# Altium PCB УШЯИ.467444.130.PcbDoc (part 2 of 4)
Units mm, origin at the board's own origin, x right, y up, seen from the top; angles counter-clockwise.
Board outline 280 x 190 mm, 6 copper layers (Top, GND, INT1, INT2, POWER, Bottom), stack 1.422 mm thick; 223 components, 176 nets, 1081 pads, 326 vias.
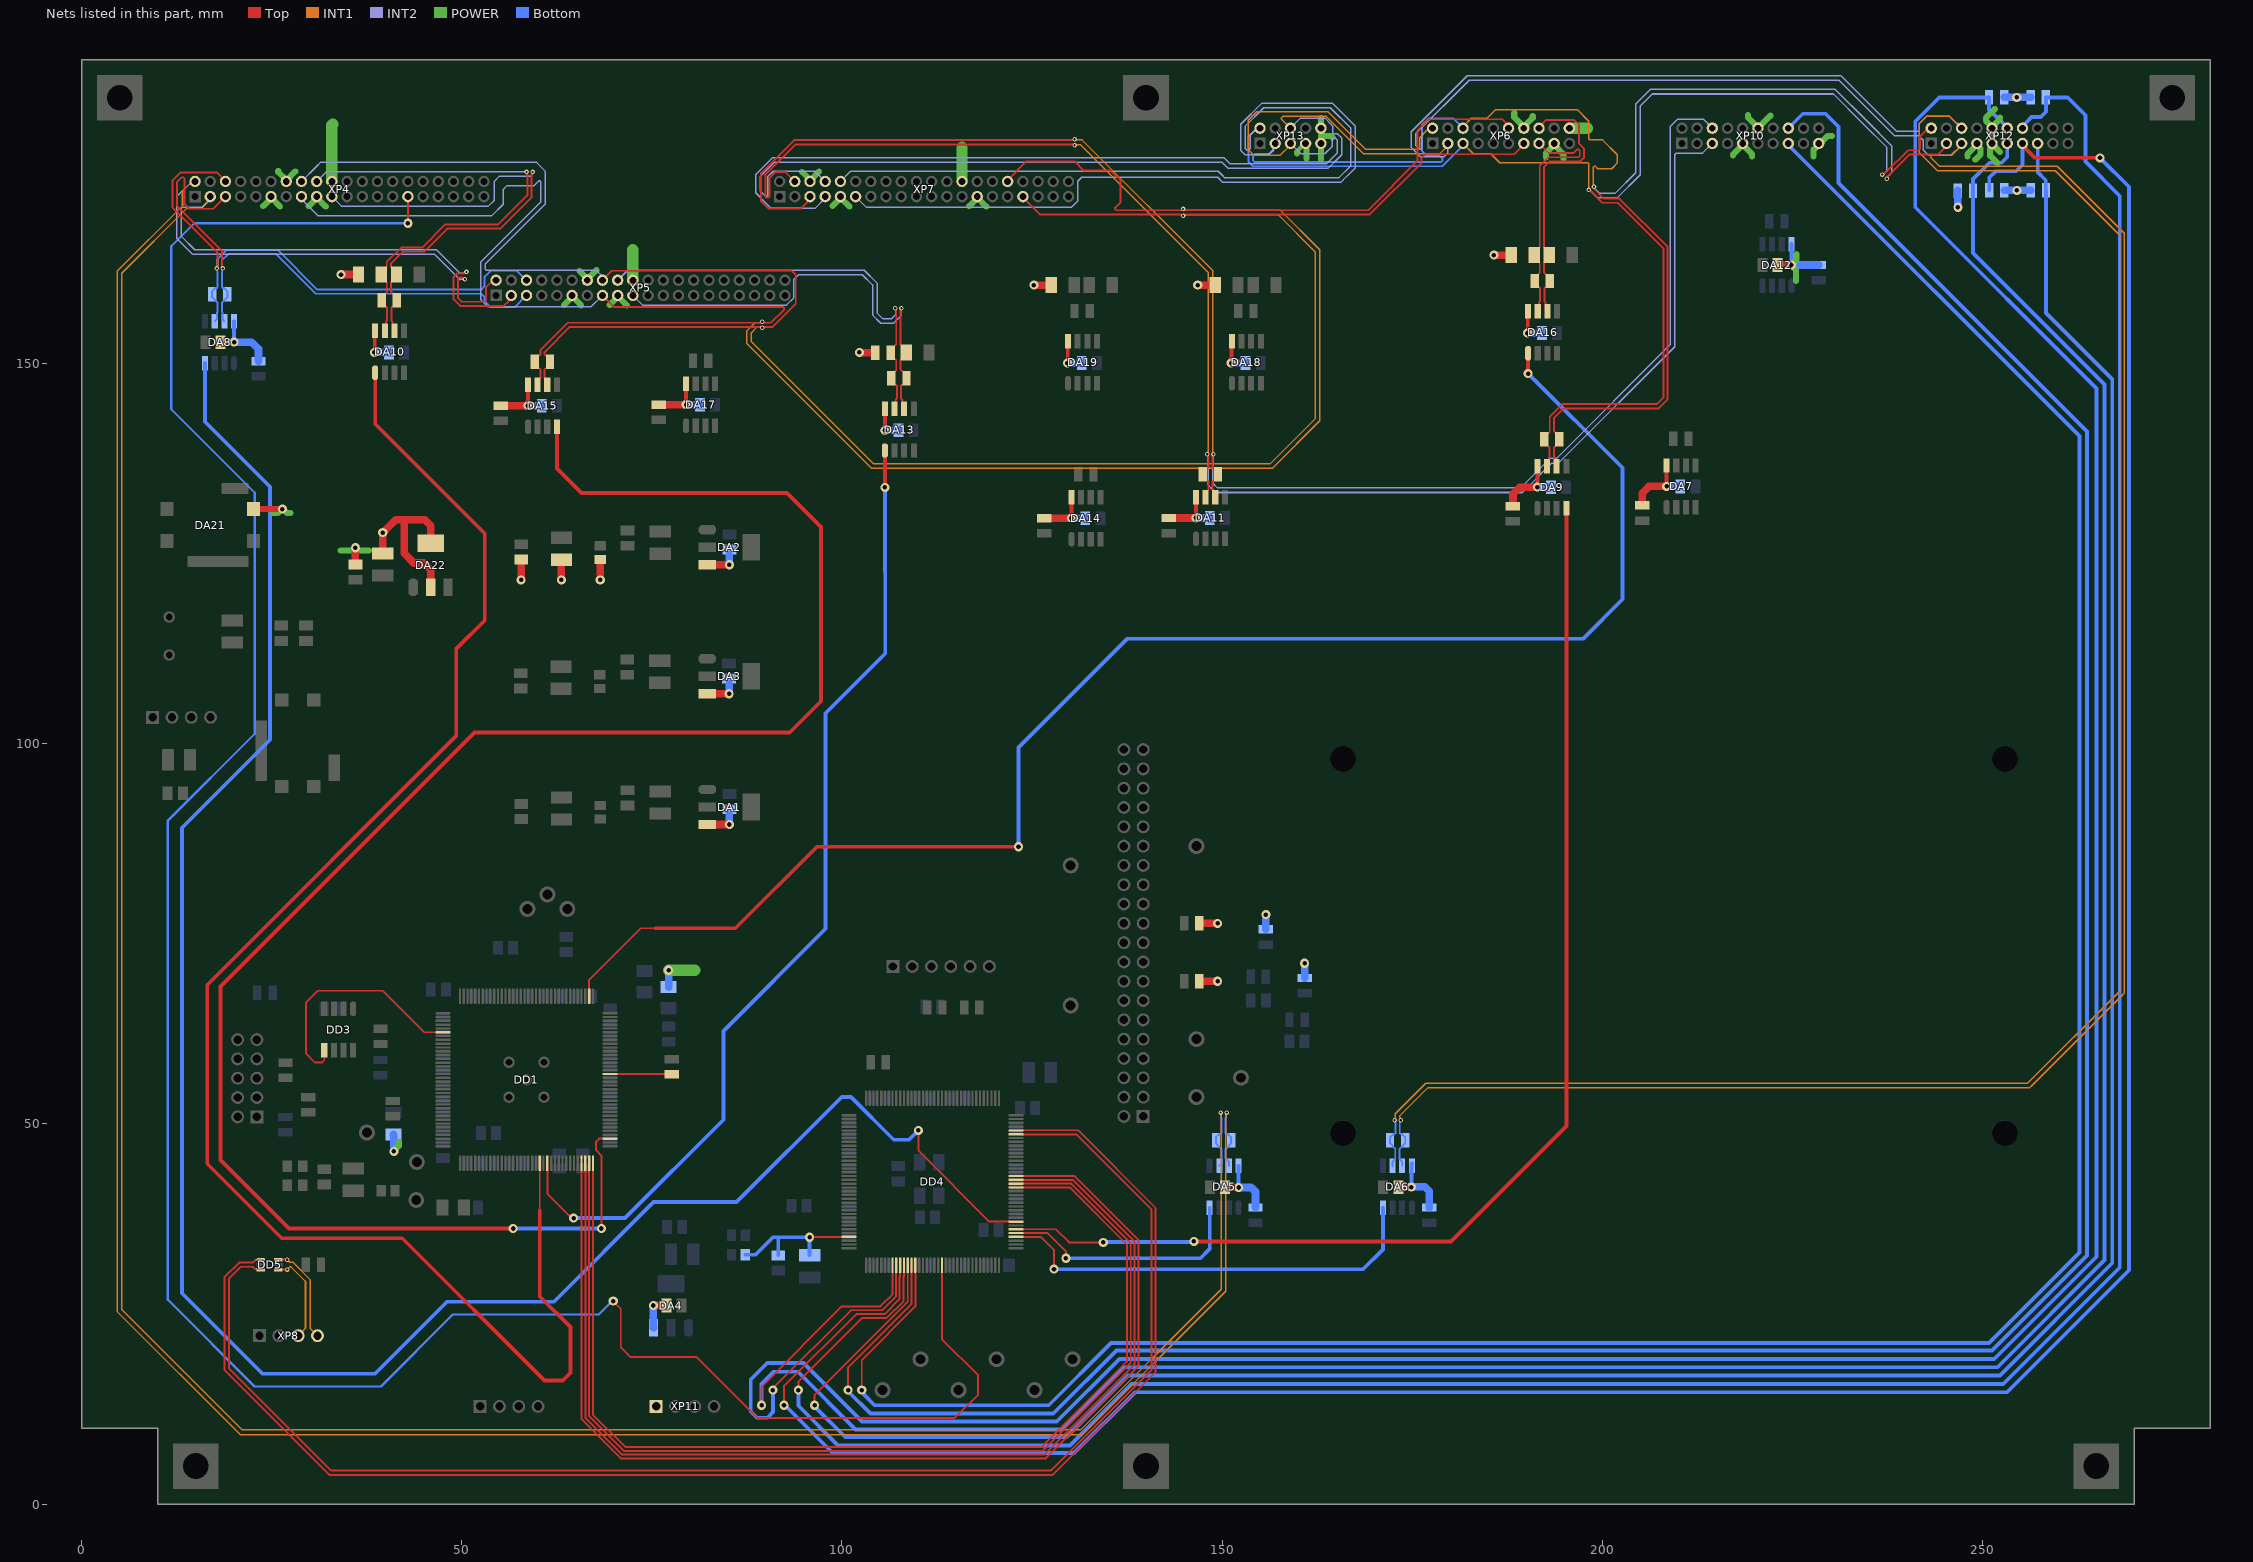
[diagram p6: the nets of this part, all layers, seen from the top]

## Part data
A1: library part Other_15, "8GB Rockchip RK3588, HDMI 2.1, Gigabit LAN port, USB2.0/3.0, microSD card slot, USB Type-C", Manufacturer="Orange Pi", Component Name="Одноплатный компьютер Orange Pi 5 Plus 8GB", Device="Orange Pi 5 Plus", Height=29mm, ID=Other_15, Other information="Идет с покупным устройством: твердотельный накопитель Kingspec SSD NE-128 2280", Weight, kg=0,107, Крепёж="Стойка УШЯИ.753124.023-01 (4шт.), винт В2.М3-6gx8.36.016 ГОСТ 17473-80 (4шт.), гайка М3-7Н.04.016 ГОСТ 5927-70 (4шт.), шайба 3.65Г.016 ГОСТ 6402-70 (8шт.),  шайба 3.04.013 ГОСТ 11371-78 (8шт.)"
C1 C27 C29 C31 C32 C33 C34 C35 C36 C37 C38 C39 C41 C42 C43 C44 C45 C46 C47 C48 C49 C50 C51 C52 C53 C54 C55 C56 C57 C58 C63 C65 C68 C69 C70 C71 C72 C73 C74 C75 C76 C77 C78 C79 C80 C81 C82 C84 C87 C90 C91 C92 C95: library part Cap_60, "Неполярный конденсатор", Case / Package="0805 [2012 Metric]", Manufacturer=Murata, Tolerance=±10%, Voltage=50V, Capacitance="0,1 µF", Component Name="Конденсатор GRM21BR71H104KA01L", Datasheet=https://www.murata.com/en-eu/products/productdetail?partno=GRM21BR71H104KA01%23, Height=1.4mm, ID=Cap_60, Weight, kg=0,000006
  C27 C29: ClassName=Class_VCINT
  C39: ClassName=Class_VCCIO
  C69: ClassName=DA8
  C70: ClassName=DA9
  C71: ClassName=DA7
  C72: ClassName=DA10
  C73: ClassName=DA11
  C74: ClassName=DA12
  C75: ClassName=DA13
  C76: ClassName=DA14
  C77: ClassName=DA15
  C78: ClassName=DA16
  C79: ClassName=DA17
  C80: ClassName=DA18
  C81: ClassName=DA19
C2 C11 C26 C28 C30 C59: library part Cap_14, "Полярный конденсатор", Case / Package="1210 [3528-21 Metric]", Manufacturer="KYOCERA AVX", Tolerance=±10%, Voltage="20V / 10V", Capacitance="4,7 µF", Component Name="Конденсатор TAJB475K020", Datasheet=https://datasheets.kyocera-avx.com/TAJ.pdf, Height=2mm, ID=Cap_14, Weight, kg=0,000016
  C11: ClassName=Class_+2.5V
  C26: ClassName=Class_VCCIO
  C28 C30: ClassName=Class_VCINT
C3 C6 C7 C8 C9 C10 C12 C14 C15 C17 C18 C19 C20 C21 C22 C23 C24 C25 C94: library part Cap_97, "Неполярный конденсатор", Case / Package="0805 [2012 Metric]", Manufacturer=Murata, Tolerance=±10%, Voltage=25V, Capacitance="0,1 µF", Catalogue="CHIPDIP 9000121574", Component Name="Конденсатор GRM21BR71E104KA01L", Datasheet=https://static.chipdip.ru/lib/250/DOC000250694.pdf, Height=1.4mm, ID=Cap_97, Weight, kg=0,000006
  C3 C10 C15: ClassName=Class_+2.5V
  C12: ClassName=Class_VCINT
  C14 C25: ClassName=Class_VCCIO
C4 C5: library part Cap_96, "Неполярный конденсатор", Case / Package="0805 [2012 Metric]", Manufacturer=Murata, Tolerance=±10%, Voltage=16V, Capacitance="1 µF", Catalogue="CHIPDIP 8046406206", Component Name="Конденсатор GRM21BR71H105KA01L", Datasheet=https://static.chipdip.ru/lib/223/DOC011223313.pdf, Height=1.4mm, ID=Cap_96, Weight, kg=0,000006
C16 C40 C62 C64 C88 C89 C93: library part Cap_56, "Полярный конденсатор", Case / Package="1210 [3528-21 Metric]", Manufacturer="KYOCERA AVX", Tolerance=±20%, Voltage="20V / 10V", Capacitance="10 µF", Component Name="Конденсатор TAJB106M020", Datasheet=https://datasheets.kyocera-avx.com/TAJ.pdf, Height=2mm, ID=Cap_56, Weight, kg=0,000016
  C16: ClassName=Class_+2.5V
  C40: ClassName=Class_VCCIO
C60 C61: library part Cap_69, "Неполярный конденсатор", Case / Package="0805 [2012 Metric]", Manufacturer=Murata, Tolerance=±5%, Voltage=50V, Capacitance="20 pF", Component Name="Конденсатор GRM2165C1H200J", Datasheet=chrome-extension://efaidnbmnnnibpcajpcglclefindmkaj/https://static.chipdip.ru/lib/235/DOC000235066.pdf, Height=1.4mm, ID=Cap_69, Weight, kg=0,000006
C66 C67: library part Cap_16, "Полярный конденсатор", Case / Package="1206 [3216-18 Metric]", Manufacturer=AVX, Tolerance=±20%, Voltage="16V / 10V", Capacitance="2,2 µF", Component Name="Конденсатор TAJA225M016", Datasheet=https://datasheets.kyocera-avx.com/TAJ.pdf, Height=1.7mm, ID=Cap_16, Weight, kg=0,000016
C86: library part Cap_70, "Полярный конденсатор", Manufacturer=Hitano, Tolerance="± 20%", Voltage=16V, Capacitance="1000 µF", Component Name="Конденсатор EXR102M16B", Datasheet=chrome-extension://efaidnbmnnnibpcajpcglclefindmkaj/https://static.chipdip.ru/lib/934/DOC044934708.pdf, Height=21mm, ID=Cap_70, Weight, kg=0,003
DA1 DA4 DA22: library part IC_1, "IC, Fixed LDO Voltage Regulator, 5.3V to 10V, 1.15V Dropout, 3.3Vout, 1Aout", Case / Package=SOT-223, Manufacturer=STMicroelectronics, Catalogue="DIGI-KEY 497-1228-2-ND", Component Name="Микросхема LD1117AS33TR", Datasheet=https://www.st.com/content/ccc/resource/technical/document/datasheet/a5/c3/3f/c9/2b/15/40/49/CD00002116.pdf/files/CD00002116.pdf/jcr:content/translations/en.CD00002116.pdf, Device=LD1117AS33TR, Height=1.9mm, ID=IC_1, Weight, kg=0,0045
  DA1: ClassName=Class_VCCIO
DA2: library part IC_8, "IC, Linear Voltage Regulator, 1 Output, 1V Dropout, 2.5Vout, 1Aout", Case / Package=SOT-223, Manufacturer=STMicroelectronics, Catalogue="DIGI-KEY 497-1227-1-ND", ClassName=Class_+2.5V, Component Name="Микросхема LD1117AS25TR", Datasheet=https://www.st.com/content/ccc/resource/technical/document/datasheet/a5/c3/3f/c9/2b/15/40/49/CD00002116.pdf/files/CD00002116.pdf/jcr:content/translations/en.CD00002116.pdf, Device=LD1117AS25TR, Height=1.9mm, ID=IC_8, Weight, kg=0,0045
DA3: library part IC_9, "IC, Fixed LDO Voltage Regulator, 1 Output, 1V Dropout, 1.2Vout, 1Aout", Case / Package=SOT-223, Manufacturer=STMicroelectronics, Catalogue="DIGI-KEY 497-6445-1-ND", ClassName=Class_VCINT, Component Name="Микросхема LD1117AS12TR", Datasheet=https://www.st.com/content/ccc/resource/technical/document/datasheet/a5/c3/3f/c9/2b/15/40/49/CD00002116.pdf/files/CD00002116.pdf/jcr:content/translations/en.CD00002116.pdf, Device=LD1117AS12TR, Height=1.9mm, ID=IC_9, Weight, kg=0,0045
DA5 DA6 DA7 DA8 DA9 DA11 DA12 DA14 DA17: library part IC_11, "IC, Transceiver, RS422/RS485, 1 Driver, 1 Receiver, 4.75 V to 5.25 V, -40°C to 125°C", Case / Package=SOIC-8, Manufacturer="Analog Devices", Component Name="Микросхема ADM483AR", Datasheet=https://www.analog.com/media/en/technical-documentation/data-sheets/ADM383.pdf, Device=ADM483AR, Height=1.75mm, ID=IC_11, Weight, kg=0,0002
  DA7: ClassName=DA7
  DA8: ClassName=DA8
  DA9: ClassName=DA9
  DA11: ClassName=DA11
  DA12: ClassName=DA12
  DA14: ClassName=DA14
  DA17: ClassName=DA17
DA10 DA13 DA15 DA16 DA18 DA19: library part IC_57, "IC, RS422 / RS485 Transceiver IC, 1 Driver, 1 Receiver, 3 V to 3.6 V, -40°C to 125°C, SOIC-8", Case / Package=SOIC-8, Manufacturer="Texas Instruments", Catalogue="ChipDip 8002953832", Component Name="Микросхема SN65HVD75D", Datasheet=https://static.chipdip.ru/lib/276/DOC012276983.pdf, Device=SN65HVD75D, Height=1.75mm, ID=IC_57, Weight, kg=0,002
  DA10: ClassName=DA10
  DA13: ClassName=DA13
  DA15: ClassName=DA15
  DA16: ClassName=DA16
  DA18: ClassName=DA18
  DA19: ClassName=DA19
DA20 DA21: library part Filt_2, "16В, 35дБ", Current=20А, Manufacturer="Murata Electronics", Component Name="Фильтр BNX028-01", Datasheet=https://static.chipdip.ru/lib/614/DOC034614186.pdf, Device=BNX028-01, Height=3.7mm, ID=Filt_2, Weight, kg=0,001
DD1: library part IC_13, "IC, Cyclone III, Field Programmable Gate Array (FPGA), 	1.15V to 1.25V, 315 MHz, 94 I/O", Case / Package="144-EQFP (20x20)", Manufacturer=Intel, Catalogue="DIGI-KEY EP3C5E144I7-ND", Component Name="Микросхема EP3C5E144I7", Datasheet=https://www.intel.com/content/dam/support/us/en/programmable/support-resources/bulk-container/pdfs/literature/hb/cfg/cyc-c51014.pdf, Device=EP3C5E144I7, Height=1.6mm, ID=IC_13, Weight, kg=0,012
DD2: library part Other_16, "Crystals, Oscillators, 20 MHz", Manufacturer="Jauch Quartz GmbH", Component Name="Кварцевый генератор O 20,0-JO32-B-3.3-1-T1-LF", Datasheet=https://static.chipdip.ru/lib/464/DOC049464856.pdf, Device="O 20,0-JO32-B-3.3-1-T1-LF", Height=1.15mm, ID=Other_16, Weight, kg=0,001
DD3: library part IC_12, "IC, FPGA Configuration Memory, Flash, 4 Mbit, 40 MHz, JTAG, Serial", Case / Package=SOIC-8, Manufacturer=Intel, Catalogue="FARNELL 1662262", Component Name="Микросхема EPCS4SI8N", Datasheet=https://www.intel.com/content/dam/support/us/en/programmable/support-resources/bulk-container/pdfs/literature/hb/cfg/cyc-c51014.pdf, Device=EPCS4SI8N, Height=1.75mm, ID=IC_12, Weight, kg=0,0002
DD4: library part IC_15, "IC, ARM Cortex-M4, 168 MHz, 1 MB ROM, 192 kB RAM, -40°C to 85°C", Case / Package="144-QFP (20x20)", Manufacturer=STMicroelectronics, Component Name="Микросхема STM32F407ZGTx", Datasheet=https://www.st.com/resource/en/datasheet/dm00037051.pdf, Device=STM32F429VIT6STM32F407ZGTx, Height=1.6mm, ID=IC_15, Weight, kg=0,0011
DD5: library part IC_5, "EMI Filter, 2-Channel, USB Upstream Terminator, ESD Protection", Case / Package=SOT-323-6, Manufacturer=STMicroelectronics, Catalogue="FARNELL 2341662", Component Name="Микросхема USBUF01W6", Datasheet=https://www.farnell.com/datasheets/1964274.pdf, Device=USBUF01W6, Height=1.1mm, ID=IC_5, Weight, kg=0,000006
L1 L3 L4 L5: library part Ind_4, Manufacturer=Murata, Resistance="0.1 ohm", Tolerance=±20%, Component Name="Дроссель LQH31CNR22M03", Datasheet=https://www.murata.com/products/productdetail?partno=LQH31CNR22M03%23, Height=2mm, ID=Ind_4, Inductance="0,22 μH", Isat=850mA, Weight, kg=0,00003
L2 L6 L7 L8 L9 L10: library part Ind_5, Case / Package="0805 [2012 Metric]", Manufacturer=Vishay, Resistance="300 mOhm", Tolerance=±25%, Catalogue="DIGI-KEY 541-2297-1-ND", Component Name="Фильтр ферритовый ILBB0805ER601V", Datasheet=https://www.vishay.com/docs/34025/ilbb0805.pdf, Height=1.1mm, ID=Ind_5, Isat=200mA, Weight, kg=0,00006
  L2: ClassName=Class_VCCIO
  L6: ClassName=Class_+2.5V
  L7: ClassName=Class_VCINT
R2: library part Res_12, Case / Package="0805 [2012 Metric]", Tolerance=±5%, Component Name="Резистор 0805-51 Ом ±5%", Height=0.7mm, ID=Res_12, Resistance=51R, Weight, kg=0,000006
R3 R5 R7: library part Res_11, Case / Package="0805 [2012 Metric]", Tolerance=±5%, Component Name="Резистор 0805-1 кОм ±5%", Height=0.7mm, ID=Res_11, Resistance=1k, Weight, kg=0,000006
R4 R6 R8 R9 R10 R11 R12 R13 R14 R15 R17 R19 R20 R21 R28 R29 R35 R36 R42: library part Res_5, Case / Package="0805 [2012 Metric]", Tolerance=±5%, Component Name="Резистор 0805-10 кОм ±5%", Height=0.7mm, ID=Res_5, Resistance=10k, Weight, kg=0,000006
  R19: ClassName=DA7
  R20: ClassName=DA8
  R21: ClassName=DA9
  R28: ClassName=DA11
  R29: ClassName=DA12
  R35: ClassName=DA14
  R36: ClassName=DA15
  R42: ClassName=DA17
R16 R18 R22 R23 R24 R26 R30 R31 R32 R33 R38 R39 R40 R44 R45 R47: library part Res_10, Case / Package="0805 [2012 Metric]", Tolerance=±5%, Component Name="Резистор 0805-100 Ом ±5%", Height=0.7mm, ID=Res_10, Resistance=100R, Weight, kg=0,000006
  R22: ClassName=DA8
  R23: ClassName=DA9
  R24: ClassName=DA7
  R26: ClassName=DA10
  R30 R31: ClassName=DA13
  R32: ClassName=DA11
  R33: ClassName=DA12
  R38: ClassName=DA16
  R39: ClassName=DA14
  R40: ClassName=DA15
  R44: ClassName=DA18
  R45: ClassName=DA17
  R47: ClassName=DA19
R25 R27 R34 R37 R41 R43 R46 R48 R49: library part Res_50, Case / Package="1206 [3216 Metric]", Tolerance=±5%, Component Name="Резистор 1206-1 кОм ±5%", Height=0.7mm, ID=Res_50, Resistance=1k, Weight, kg=0,0000162
  R25 R27: ClassName=DA10
  R34: ClassName=DA13
  R37 R41: ClassName=DA16
  R43 R48: ClassName=DA18
  R46 R49: ClassName=DA19
R50: library part Res_89, Case / Package="0805 [2012 Metric]", Tolerance=±5%, Component Name="Резистор 0805-30 Ом ±5%", Height=0.7mm, ID=Res_89, Resistance=30R, Weight, kg=0,000006
R51 R52 R53 R54 R55 R56 R57 R58 R59 R60 R61: library part Res_57, Case / Package="0805 [2012 Metric]", Tolerance=±1%, Component Name="Резистор 0805-10 кОм ±1%", Height=0.7mm, ID=Res_57, Resistance=10k, Weight, kg=0,000006
TP1 TP2 TP3 TP4 TP5 TP6 TP7 TP8 TP9 TP10 TP11 TP12 TP13 TP14 TP15 TP16 TP17 TP18: library part Pad_13, Component Name=TP_DSP_1.3, ID=Pad_13
XP1: library part Conn_7, "Male, 10 pins, 2 rows, Vertical", Manufacturer="Connfly electronic", Component Name="Вилка PLD-10", Datasheet=https://static.chipdip.ru/lib/977/DOC005977245.pdf, Device=PLD-10, Height=10.8mm, ID=Conn_7, Weight, kg=0,00052, Крепёж="Не нужно"
XP2: library part Conn_2, "Male, 6 pin, 1 row, Vertical, Board-to-Board, 2.54 mm", Manufacturer="TE Connectivity", Catalogue="TE Internal 280372-2", Component Name="Вилка AMPMODU II 280372-2", Datasheet=https://www.te.com/usa-en/product-280372-2.datasheet.pdf, Device="AMPMODU II 280372-2", Height=12.8mm, ID=Conn_2, Weight, kg=0,0013, Крепёж="Не нужно"
XP3: library part Conn_30, "Male, 40 pins, 2 rows, Vertical, DS1013-40S, 2.54 mm", Manufacturer="Connfly electronic", Catalogue="ChipDip 57941", Component Name="Вилка BH-40", Datasheet=https://static.chipdip.ru/lib/525/DOC059525716.pdf, Device=BH-40, Height=9.1mm, ID=Conn_30, Weight, kg=0,0045, Крепёж="Не нужно"
XP4 XP5 XP7: library part Conn_29, "Male, 40 pins, 2 rows, Vertical, DS1014-40, 2 mm", Manufacturer="Connfly electronic", Catalogue="ChipDip 9000019617", Component Name="Вилка BH2-40", Datasheet=https://static.chipdip.ru/lib/525/DOC059525726.pdf, Device=BH2-40, Height=5.8mm, ID=Conn_29, Weight, kg=0,0014, Крепёж="Не нужно"
XP6 XP10 XP12: library part Conn_31, "Male, 20 pins, 2 rows, Right Angle, DS1014-20RF1B-B, 2 mm", Manufacturer="Connfly electronic", Catalogue="ChipDip 8027300167", Component Name="Вилка BH2-20R", Datasheet=https://static.chipdip.ru/lib/525/DOC059525726.pdf, Device=BH2-20R, Height=5.6mm, ID=Conn_31, Weight, kg=0,0016, Крепёж="Не нужно"
XP8 XP9 XP11 XP14: library part Conn_3, "Male, 4 pin, 1 row, Vertical, Board-to-Board, 2.54 mm", Manufacturer="TE Connectivity", Catalogue="TE Internal 280371-2", Component Name="Вилка AMPMODU II 280371-2", Datasheet=https://www.te.com/usa-en/product-280371-2.datasheet.pdf, Device="AMPMODU II 280371-2", Height=12.8mm, ID=Conn_3, Weight, kg=0,001, Крепёж="Не нужно"
XP13: library part Conn_32, "Male, 10 pins, 2 rows, Vertical, DS1014-10RF1B-B, 2 mm", Manufacturer="Connfly electronic", Catalogue="ChipDip 8144058573", Component Name="Вилка BH2-10R", Datasheet=https://static.chipdip.ru/lib/525/DOC059525726.pdf, Device=BH2-10R, Height=5.6mm, ID=Conn_32, Weight, kg=0,00071, Крепёж="Не нужно"
ZQ1: library part Rez_1, Frequency=25MHz, Manufacturer="Jauch Quartz GmbH", Component Name="Резонатор Q 25.0JXS63-12-30/30-FU", Datasheet=https://www.jauch.com/downloadfile/57fdedace792c_938dbcb9dba48037cc0e/jxs63-200613.pdf, Device="Q 25.0JXS63-12-30/30-FU", Height=1mm, ID=Rez_1, Weight, kg=0,001

## Free pads (board coordinates)
  rect 6x6 hole 3.4: 0(5,185) 0(15,5) 0(140,5) 0(140,185) 0(265,5) 0(275,185)

## Via types
v1: diameter 1.2, hole 0.6, Top to Bottom, tented both sides, 284 vias
v2: diameter 0.6, hole 0.3, Top to Bottom, tented both sides, 42 vias

## Nets (pads, with @x,y where several pads share a name; then routed paths per layer and width w, separated by ;. In a path a pad name is that pad's centre, name@x,y a point inside that pad or via, vN(x,y) a via of type N, cw(c..) or ccw(c..) an arc to the next point about the centre after c; other vN are vias at no path point)
3/50V: DD4.57 XP4.29 | length 329.6
  Top w0.25: v1@69.925,26.65 70.907,25.668 70.907,20.618 72.175,19.35 80.85,19.35 88.875,11.325 114.825,11.325 117.9,14.4 117.9,16.975 113.162,21.713 DD4.57@113.162,31.412
  Top w0.3: v1(42.9,168.5) XP4.29@42.9,172
  Bottom w0.3: v1(42.9,168.5) 14.789,168.5 11.775,165.486 11.775,144.025 22.75,133.05 22.75,101.35 11.325,89.925 11.325,26.875 22.725,15.475 39.35,15.475 48.8,24.925 68,24.925 69.775,26.7 v1(69.914,26.7) ; XP4.29@42.9,171.675 XP4.29@42.9,172
20+E: DD4.48 R61.2 XP12.15 | length 356.8
  Top w0.25: v1@96.4,12.85 96.4,14.364 108.662,26.626 DD4.48@108.662,31.412
  Bottom w0.5: v1@96.4,12.85 100.425,8.825 129.553,8.825 137.628,16.9 252.328,16.9 267.1,31.672 267.1,148 258.4,156.7 R61.2@258.4,172.825 ; XP12.15@257.3,179 257.3,175.225 258.375,174.15 R61.2@258.375,172.825
  other v1: 96.4,13
20-E: DD4.47 R60.2 XP12.14 | length 377.5
  Top w0.25: v1@94.275,14.85 94.275,16.075 102.7,24.5 105.9,24.5 108.112,26.712 108.112,29.912 108.162,29.962 DD4.47@108.162,31.412
  Bottom w0.5: v1@94.275,14.85 94.275,12.925 99.5,7.7 129.984,7.7 138.084,15.8 252.784,15.8 268.1,31.116 268.1,172.1 263.6,176.6 263.6,182.7 261.25,185.05 R60.2@258.375,185.05 ; XP12.14@255.3,181 255.3,181.271 255.723,181.694 255.723,181.698 256.5,182.475 257.7,182.475 258.4,183.175 R60.2@258.4,185.025
  other v1: 94.275,15
50E+: DD4.50 XP10.15 | length 350.6
  Top w0.25: v1(102.6,15) 102.6,18.95 109.662,26.012 DD4.50@109.662,31.412
  Bottom w0.5: v1(102.6,15) 102.6,14.811 102.905,14.506 102.905,14.395 104.3,13 127.2,13 135.4,21.2 250.9,21.2 262.8,33.1 262.8,140.5 224.5,178.8 XP10.15@224.5,179
50E-: DD4.49 XP10.16 | length 363
  Top w0.25: v1(100.813,15) 100.813,18.001 109.162,26.351 DD4.49@109.162,31.412
  Bottom w0.5: v1(100.813,15) 100.813,14.837 103.75,11.9 127.8,11.9 136.1,20.2 251.314,20.2 263.8,32.686 263.8,141.1 231.1,173.8 231.1,181.2 229.4,182.9 226.4,182.9 XP10.16@224.5,181
200+E: DD4.46 R59.2 XP12.13 | length 385.2
  Top w0.25: v1@92.375,12.85 92.375,15.475 101.9,25 105.6,25 107.587,26.987 107.587,29.887 107.662,29.962 DD4.46@107.662,31.412
  Top w0.5: XP12.13@255.3,179 255.3,178.729 256.929,177.1 v1(265.5,177.1)
  Bottom w0.5: v1(92.375,13) 92.5,13 98.8,6.7 130.54,6.7 138.54,14.7 253.24,14.7 269.3,30.76 269.3,173.3 v1(265.5,177.1) ; R59.2@250.925,172.825 250.925,174.5 251.75,175.325 254.425,175.325 255.3,176.2 XP12.13@255.3,179
200-E: DD4.45 R58.2 XP12.12 | length 401.5
  Top w0.25: v1(90.925,15) 90.925,15.225 101.2,25.5 105.3,25.5 107.137,27.337 107.137,30.414 107.137,31.387 DD4.45@107.162,31.412
  Bottom w0.5: v1@90.925,14.85 90.925,12.103 90.186,11.364 88.814,11.364 88,12.178 88,16.4 90.175,18.575 94.925,18.575 102.65,10.85 128.25,10.85 136.5,19.1 251.6,19.1 265.039,32.539 265.039,146.761 241.2,170.6 241.2,181.9 244.35,185.05 R58.2@250.9,185.05 250.9,183.475 253.3,181.075 XP12.12@253.3,181
3000VE: DD4.44 R57.2 XP12.11 | length 378.2
  Top w0.25: v1@89.425,12.85 89.425,15.425 100,26 105.05,26 106.662,27.612 DD4.44@106.662,31.412
  Bottom w0.5: v1@89.425,12.85 89.425,15.825 91,17.4 94.2,17.4 101.775,9.825 128.781,9.825 136.956,18 252,18 266.1,32.1 266.1,147.3 248.8,164.6 248.8,174.3 250.95,176.45 252.55,176.45 253.3,177.2 XP12.11@253.3,179
  other v1: 89.425,13
+2.5V: C15.2 C16.+ L1.1 L3.1 L6.2 | length 17.4
  Top w1: v1(57.8,121.575) C15.2@57.8,124.275 ; v1(63.1,121.575) C16.+@63.1,124.225 ; v1(68.2,121.575) L6.2@68.2,124.275
  POWER w0.8: v1(41.05,46.405) 41.05,46.46 41.72,47.129 41.72,47.605
  POWER w1.5: v1(77.2,70.225) 80.625,70.225
  Bottom w1: L1.1@41,48.625 41.025,48.6 41.025,46.43 v1(41.05,46.405) ; L3.1@77.2,68.025 v1(77.2,70.225)
+3.3VB: C72.2 C75.2 C77.2 C78.2 C80.2 C81.2 C92.2 C93.+ DA10.8 DA13.8 DA15.8 DA16.8 DA18.8 DA19.8 DA22.2 DA22.4 R30.1 R36.1 R37.1 R43.1 R51.1 R52.1 R55.1 R56.1 R57.1 R58.1 R59.1 R60.1 R61.1 XP4.20 XP5.20 XP6.20 XP7.26 XP10.19 XP12.7 XP13.7 | length 116.9
  Top w0.5: v1(38.5,151.5) 38.547,151.547 38.547,154.302 DA10.8@38.595,154.35 ; v1(58.695,144.5) DA15.8@58.695,147.25 ; v1(105.645,141.247) DA13.8@105.645,144.097 ; v1(129.65,150.1) 129.697,150.147 129.697,152.902 DA19.8@129.745,152.95 ; v1(151.2,150.1) 151.247,150.147 151.247,152.902 DA18.8@151.295,152.95 ; v1(190.175,154.05) 190.223,154.097 190.223,156.853 DA16.8@190.27,156.9
  Top w1: C92.2@36,123.6 v1(36,125.8) ; C93.+@39.6,125.05 v1(39.6,127.8) ; v1@39.638,127.838 41.3,129.5 42.4,129.5 ; DA22.2@45.8,120.7 DA22.2@45.9,120.6 ; DA22.2@45.9,121.3 45.9,122.9 45,123.8 43.7,123.8 42.4,125.1 42.4,129.5 ; DA22.4@45.9,126.4 45.9,128.7 45.1,129.5 42.4,129.5 ; R36.1@55.1,144.5 v1(58.695,144.5) ; v1(102.3,151.497) 102.326,151.471 104.374,151.471 R30.1@104.4,151.445 ; v1(146.8,160.35) R43.1@149.1,160.35 ; R55.1@147.025,68.776 v1(149.425,68.776) ; R56.1@147.027,76.398 149.423,76.398 v1(149.425,76.4) ; v1(185.775,164.3) R37.1@188.075,164.3
  POWER w0.6: 159.849,177.849 159.849,177.935 160.914,179 XP13.7@161,179 161,178.512 XP13.7@161.175,178.337
  POWER w0.8: 34.05,125.425 34.075,125.45 35.575,125.45 35.925,125.8 v1(36,125.8) 36.108,125.8 36.483,125.425 37.8,125.425 ; 159.849,177.671 159.849,177.849 ; 161.1,177.05 XP13.7@161.1,178.262 ; 227.819,177.283 227.819,178.181 228.5,178.862 XP10.19@228.5,179 228.689,179 229.639,179.95 230.25,179.95 ; 248.049,177.283 248.049,177.559 XP12.7@249.3,178.811 ; 249.088,176.865 249.787,177.564 249.787,178.324 XP12.7@249.3,178.811 ; XP12.7@249.3,179 XP12.7@249.3,178.811
  POWER w1: XP6.20@195.7,181 XP6.20@195.7,181.051
  POWER w1.5: XP4.20@32.9,174 32.9,181.4 33,181.5 ; XP5.20@72.5,161 72.5,165 ; XP7.26@115.8,174 115.8,178.516 ; XP6.20@195.7,181 198.08,181
  Bottom w1: v1(38.5,151.5) C72.2@40.4,151.5 ; v1(58.695,144.5) C77.2@60.505,144.5 ; v1@105.55,141.247 v1(105.645,141.247) C75.2@107.45,141.247 ; v1(129.65,150.1) C81.2@131.55,150.1 ; v1(151.2,150.1) C80.2@153.1,150.1 ; R52.1@155.775,75.6 v1(155.775,77.55) ; R51.1@160.875,69.2 v1(160.875,71.15) ; v1(190.175,154.05) C78.2@192.075,154.05 ; v1(246.8,170.6) R57.1@246.8,172.8 ; R58.1@252.9,185.05 v1(254.55,185.05) R60.1@256.375,185.05 ; R59.1@252.925,172.825 v1(254.575,172.825) R61.1@256.4,172.825
+5V: C3.2 C12.2 C14.2 C58.1 C65.2 C68.2 C69.2 C70.2 C71.2 C73.2 C74.2 C76.2 C79.2 DA1.3 DA2.3 DA3.3 DA4.3 DA5.8 DA6.8 DA7.8 DA8.8 DA9.8 DA11.8 DA12.8 DA14.8 DA17.8 DA21.2 R15.1 R17.1 R19.1 R20.1 R21.1 R25.1 R28.1 R29.1 R35.1 R42.1 R46.1 XP4.11 XP4.14 XP4.17 XP5.11 XP5.14 XP5.17 XP6.14 XP6.17 XP7.6 XP7.9 XP7.27 XP10.9 XP10.12 XP11.1 XP12.9 XP12.10 XP13.9 XP13.10 | length 179
  Top w0.5: v1(79.495,144.634) DA17.8@79.495,147.384 ; v1(130.195,129.7) DA14.8@130.195,132.45 ; v1(146.57,129.725) DA11.8@146.57,132.475 ; v1(191.489,133.775) DA9.8@191.489,136.525 ; v1(208.489,133.875) DA7.8@208.489,136.625
  Top w0.8: DA21.2@22.603,130.9 v1(26.4,130.9) ; C65.2@150.4,41.7 C65.2@150.425,41.675 ; v1@152.16,41.675 v1(152.185,41.65)
  Top w1: C69.2@18.25,152.85 v1(20.036,152.85) ; v1(34.1,161.75) R25.1@36.4,161.75 ; v1(75.2,26.125) C58.1@76.9,26.125 C58.1@76.925,26.125 ; R42.1@75.9,144.634 v1(79.495,144.634) ; DA3.3@82.25,106.6 v1(85.15,106.6) ; DA1.3@82.3,89.4 v1(85.2,89.4) ; DA2.3@82.3,123.575 v1(85.2,123.575) ; v1(125.25,160.35) R46.1@127.55,160.35 ; R35.1@126.6,129.7 v1(130.195,129.7) ; R28.1@142.975,129.725 v1(146.57,129.725) ; C65.2@150.425,41.675 v1@152.16,41.675 ; C68.2@173.2,42.1 173.2,41.85 173.35,41.7 v1(174.9,41.7) ; R21.1@188.275,131.275 188.275,132.875 189.175,133.775 v1(191.489,133.775) ; R19.1@205.275,131.375 205.275,132.975 206.175,133.875 v1(208.489,133.875) ; C74.2@223.095,163 v1(224.905,163)
  POWER w0.8: 23.85,170.761 XP4.11@24.9,171.811 ; XP4.11@24.9,171.885 26.1,170.685 ; 25.19,130.375 25.767,130.375 26.292,130.9 v1(26.4,130.9) 26.508,130.9 27.033,130.375 27.484,130.375 ; 25.85,175.362 25.85,175.239 26.9,174.189 XP4.14@26.9,174.115 ; XP4.14@26.9,174 XP4.14@26.9,174.115 ; 28.1,175.315 XP4.14@26.9,174.115 ; 29.85,170.761 XP4.17@30.9,171.811 ; XP4.17@30.9,171.885 32.1,170.685 ; 63.45,157.761 XP5.11@64.5,158.811 ; XP5.11@64.5,158.885 65.7,157.685 ; 65.45,162.239 XP5.14@66.5,161.189 ; XP5.14@66.5,161.115 67.7,162.315 ; 69.45,157.761 XP5.17@70.5,158.811 ; XP5.17@70.5,158.885 71.7,157.685 ; 94.75,175.239 XP7.6@95.8,174.189 ; XP7.6@95.8,174.115 97,175.315 ; 98.75,170.761 XP7.9@99.8,171.811 ; XP7.9@99.8,171.885 101,170.685 ; 116.75,170.761 XP7.27@117.8,171.811 ; XP7.27@117.8,171.885 119,170.685 ; 163,176.879 XP13.9@163,179 163,180 ; 163,182.362 XP13.10@163,181 ; XP13.10@163.189,181 XP13.10@163,181 ; 164.5,179.811 164.311,180 163,180 ; 188.449,183.024 188.449,182.441 XP6.14@189.7,181.189 ; XP6.14@189.7,181 XP6.14@189.7,181.189 ; 190.875,182.586 190.875,182.364 XP6.14@189.7,181.189 ; 192.596,177.163 192.596,177.707 XP6.17@193.7,178.811 ; XP6.17@193.7,179 XP6.17@193.7,178.811 ; 194.909,176.929 194.909,177.602 XP6.17@193.7,178.811 ; 217.249,177.383 217.249,177.559 XP10.9@218.5,178.811 ; XP10.9@218.5,179 XP10.9@218.5,178.811 ; 219.181,182.746 219.181,182.439 220.5,181.119 XP10.12@220.5,181 222.137,182.637 222.167,182.637 ; 219.735,177.283 219.735,177.576 XP10.9@218.5,178.811 ; v1@224.905,162.946 224.905,162.937 225.51,162.331 225.51,160.904 ; v1@224.905,163.054 225.6,163.749 225.6,164.474 ; XP12.9@251.3,178.907 252.332,177.875 ; 251.652,183.5 250.5,182.348 250.5,181.989 XP12.10@251.3,181.189 ; 251.981,176.435 251.05,177.366 251.05,178.255 251.166,178.371 251.166,178.866 XP12.9@251.3,179 XP12.10@251.3,181 XP12.10@251.3,181.189 ; 252.366,182.387 252.366,182.255 XP12.10@251.3,181.189 ; 163,180 XP13.10@163,181
  POWER w1: v1@224.905,162.946 v1(224.905,163) v1@224.905,163.054
  Bottom w0.5: v1(20.036,152.85) DA8.8@20.036,155.6 ; v1(152.185,41.65) DA5.8@152.185,44.492 ; v1@174.975,41.775 174.937,41.812 174.937,44.755 DA6.8@174.975,44.792 ; v1(224.905,163) DA12.8@224.905,165.75
  Bottom w1: v1(20.036,152.85) 22.35,152.85 23.25,151.95 R20.1@23.25,150.35 ; v1(75.2,26.125) 75.203,26.122 75.203,23.203 DA4.3@75.206,23.2 ; v1(79.495,144.634) C79.2@81.305,144.634 ; v1(85.15,106.6) 85.15,107.9 ; v1(85.2,89.4) 85.2,90.7 ; v1(85.2,123.575) 85.2,124.875 ; v1(130.195,129.7) C76.2@132.005,129.7 ; v1(146.57,129.725) C73.2@148.38,129.725 ; v1(152.185,41.65) 153.819,41.65 154.405,41.064 R15.1@154.405,39.017 ; v1@174.975,41.775 v1(174.9,41.7) 174.954,41.7 175.007,41.753 176.689,41.753 177.275,41.167 R17.1@177.275,39.017 ; v1(191.489,133.775) C70.2@193.275,133.775 ; v1(208.489,133.875) C71.2@210.275,133.875 ; v1(224.905,163) R29.1@228.5,163
A0_RG: DD1.71 DD4.90 | length 145.3
  Top w0.25: DD1.71@66.75,44.837 66.75,41.579 66.75,11.571 71.321,7 126.429,7 138,18.571 138,34.332 130.182,42.15 DD4.90@122.9,42.15
A1_RG: DD1.70 DD4.91 | length 147.9
  Top w0.25: 66.25,41.549 DD1.70@66.25,44.837 ; 66.25,41.654 66.25,11.364 71.114,6.5 126.636,6.5 138.5,18.364 138.5,34.539 130.389,42.65 DD4.91@122.9,42.65
A2_RG: DD1.72 DD4.89 | length 142.9
  Top w0.25: 67.25,41.6 DD1.72@67.25,44.837 ; 67.25,41.64 67.25,11.778 71.528,7.5 126.222,7.5 137.5,18.778 137.5,34.125 129.975,41.65 DD4.89@122.9,41.65
ASDO: DD1.6 DD3.5 | length 31.6
  Top w0.25: DD3.5@31.895,59.375 31.895,58.42 31.56,58.085 30.68,58.085 29.5,59.265 29.5,66.003 31.022,67.525 39.6,67.525 45.05,62.075 DD1.6@47.512,62.075
AVCST: C63.2 C64.+ DD4.33 L9.2 | length 19.4
  Top w0.25: v1(95.75,35.1) 95.8,35.15 DD4.33@100.924,35.15
  Bottom w0.5: L9.2@87.275,32.8 88.625,32.8 90.925,35.1 91.575,35.1 ; C63.2@91.625,32.725 91.625,35.05 91.575,35.1 ; C64.+@95.75,32.725 v1(95.75,35.1) 91.575,35.1
CLK1_DAC: DA8.4 DD4.80 | length 269.2
  Top w0.25: v1(110.05,49.15) 110.075,49.125 110.075,46.475 119.4,37.15 DD4.80@122.9,37.15
  Bottom w0.5: DA8.4@16.226,150.1 16.226,142.374 24.775,133.825 24.775,100.55 13.2,88.975 13.2,27.725 23.775,17.15 38.575,17.15 48.05,26.625 62.1,26.625 75.225,39.75 86.15,39.75 99.968,53.568 101.182,53.568 106.825,47.925 108.825,47.925 v1(110.05,49.15)
CLK1_DAC_n: DA8.7 R22.1 XP4.5 XP5.5 | length 78
  Top w0.25: v2(18.55,162.55) 18.483,162.617 18.483,162.813 18.425,162.871 18.425,164.853 12.5,170.778 12.5,173.897 13.146,174.544 13.354,174.544 13.5,174.397 13.5,171.049 14.15,170.399 17.299,170.399 XP4.5@18.9,172
  Bottom w0.25: DA8.7@18.766,155.6 18.531,155.836 18.531,156.744 18.425,156.85 18.425,158.025 19.15,158.75 R22.1@19.15,159.15 19.15,159.55 18.725,159.975 18.571,159.975 18.425,160.121 18.425,162.05 18.483,162.108 18.483,162.483 v2(18.55,162.55) 18.483,162.617 18.483,162.813 18.425,162.871 18.425,163.604 19.271,164.45 25.55,164.45 30.778,159.222 52.528,159.222 53,158.75 53,158.25 53.75,157.5 57,157.5 XP5.5@58.5,159
CLK1_DAC_p: DA8.6 R22.2 XP4.6 XP5.6 | length 76.7
  Top w0.25: v2(17.75,162.55) 17.817,162.617 17.817,162.813 17.875,162.871 17.875,164.625 11.95,170.55 11.95,174.125 13,175.175 17.725,175.175 XP4.6@18.9,174
  Bottom w0.25: DA8.6@17.496,155.6 17.763,155.867 17.763,156.713 17.875,156.825 17.875,158.025 17.15,158.75 R22.2@17.15,159.15 17.15,159.55 17.575,159.975 17.729,159.975 17.875,160.121 17.875,162.05 17.817,162.108 17.817,162.483 v2(17.75,162.55) 17.817,162.617 17.817,162.813 17.875,162.871 17.875,163.831 19.044,165 25.778,165 31.006,159.772 52.522,159.772 53,160.25 53,161.471 53.779,162.25 57.25,162.25 XP5.6@58.5,161
CLK2_DAC: DA9.4 DD4.78 | length 160.8
  Top w0.25: DD4.78@122.9,36.15 128.15,36.15 129.875,34.425 v1(134.375,34.425)
  Top w0.5: v1(146.3,34.55) 180.125,34.55 195.299,49.724 DA9.4@195.299,131.025
  Bottom w0.25: v1(134.375,34.425) v1@134.437,34.488 ; v1@146.238,34.488 v1(146.3,34.55)
  Bottom w0.5: v1@134.437,34.488 v1@146.238,34.488
CLK2_DAC_n: DA9.7 R23.1 XP6.5 XP7.10 XP12.2 XP13.2 | length 276.4
  Top w0.25: DA9.7@192.759,136.525 192.994,136.761 192.994,137.669 193.1,137.775 193.1,138.95 192.375,139.675 R23.1@192.375,140.075 192.375,140.475 192.8,140.9 192.954,140.9 193.108,141.055 193.108,143.056 194.752,144.7 207.2,144.7 208.069,145.569 208.069,165.178 202.048,171.199 200.02,171.199 198.52,172.7 198.345,172.875 v2(198.25,172.875) ; v2(236.874,174.901) 236.969,174.901 237.389,175.321 237.471,175.321 240.25,178.1 241.654,178.1 241.8,178.246 241.8,179.875 242.567,180.642 242.604,180.642 242.962,181 XP12.2@243.3,181
  INT1 w0.2: XP6.5@181.7,179 183.05,177.65 185.353,177.65 186.546,176.457 198.133,176.457 198.25,176.34 v2(198.25,172.875)
  INT2 w0.2: XP7.10@99.8,174 101.125,175.325 149.503,175.325 150.029,174.799 150.328,174.5 165.4,174.5 166.95,176.05 166.95,180.997 164.247,183.7 155.5,183.7 153.075,181.275 153.075,178.3 153.275,178.1 153.45,178.1 153.725,178.375 153.725,180.1 154.27,180.645 154.293,180.645 154.648,181 XP13.2@155,181 ; v2(198.25,172.875) 198.358,172.875 198.509,172.724 198.548,172.724 199.447,171.825 201.963,171.825 205.025,174.887 205.025,183.926 206.599,185.5 230.43,185.5 234.276,181.654 237.474,178.456 237.474,175.359 237.169,175.054 237.136,175.054 236.982,174.901 v2(236.874,174.901)
  Bottom w0.25: XP13.2@155,181 154.662,181 154.329,180.667 154.242,180.667 153.5,179.925 153.5,176.572 154.072,176 179,176 181.7,178.7 XP6.5@181.7,179
CLK2_DAC_p: DA9.6 R23.2 XP6.6 XP7.11 XP12.3 XP13.3 | length 302.6
  Top w0.25: DA9.6@194.029,136.525 193.762,136.792 193.762,137.638 193.65,137.75 193.65,138.95 194.375,139.675 R23.2@194.375,140.075 194.375,140.475 193.658,141.192 193.658,142.828 194.98,144.15 207.428,144.15 208.619,145.342 208.619,165.406 202.276,171.749 200.248,171.749 199.001,172.997 199.001,173.223 v2(198.934,173.29) ; v2(237.44,174.335) 237.44,174.43 237.86,174.85 237.86,174.933 240.478,177.55 244.2,177.55 244.93,178.28 244.93,178.291 245.3,178.662 XP12.3@245.3,179
  INT1 w0.2: XP6.6@181.7,181 181.7,181.225 182.775,182.3 184.853,182.3 186.003,183.45 196.722,183.45 198.25,181.922 198.25,179.574 198.367,179.457 200.063,179.457 202,177.521 202,176.411 201.268,175.679 199.432,175.679 199.133,175.978 198.967,175.978 198.85,175.861 198.85,173.607 198.857,173.6 198.857,173.367 v2(198.934,173.29)
  INT2 w0.2: XP7.11@101.8,172 103.225,170.575 130.175,170.575 131.025,171.425 131.025,174.025 131.55,174.55 149.429,174.55 150.079,173.9 165.649,173.9 165.924,174.176 166.899,175.151 167.55,175.801 167.55,181.246 164.496,184.3 155.251,184.3 152.475,181.524 152.475,178.051 153.026,177.5 156.075,177.5 156.751,178.176 156.751,178.751 XP13.3@157,179 ; v2(198.934,173.29) 198.934,173.186 199.695,172.425 201.715,172.425 204.425,175.135 204.425,184.175 206.35,186.1 230.679,186.1 234.876,181.903 238.074,178.705 238.074,175.111 237.593,174.63 237.593,174.597 237.44,174.443 v2(237.44,174.335)
  Bottom w0.25: XP13.3@157,179 156.78,178.78 156.78,178.13 156.275,177.625 154.4,177.625 154.05,177.275 154.05,176.8 154.3,176.55 178.772,176.55 179.008,176.785 179.008,176.992 178.6,177.4 176.95,177.4 176.3,178.05 176.3,181.45 177.125,182.275 180.475,182.275 181.7,181.05 XP6.6@181.7,181
CLK_ADC: DA15.4 DD1.75 | length 251.3
  Top w0.25: v1(68.353,36.25) 68.353,45.847 67.65,46.55 67.65,47.675 68.05,48.075 DD1.75@69.488,48.075
  Top w0.5: v1(56.75,36.25) 27.25,36.25 18.25,45.25 18.25,68.085 44.565,94.4 51.665,101.5 93.136,101.5 97.25,105.614 97.25,128.521 92.771,133 65.75,133 62.505,136.245 DA15.4@62.505,141.75
  Bottom w0.5: v1(56.75,36.25) v1(68.353,36.25)
CLK_ADC_n: DA15.7 R40.1 XP4.15 XP5.15 XP6.12 XP7.32 | length 348.8
  Top w0.25: DA15.7@59.965,147.25 59.965,147.8 60.325,148.16 60.325,148.7 60.325,149.279 60.179,149.425 60.025,149.425 59.6,149.85 R40.1@59.6,150.25 59.6,150.65 60.025,151.075 60.179,151.075 60.325,151.221 60.325,151.783 63.952,155.411 89.201,155.411 89.259,155.469 89.455,155.469 v2(89.522,155.536) 89.589,155.469 89.786,155.469 89.844,155.411 90.654,155.411 92.39,157.146 92.39,157.354 92.244,157.5 70,157.5 XP5.15@68.5,159 ; XP7.32@121.8,174 121.8,174.175 124.25,176.625 126.65,176.625 130.643,176.625 131.843,175.425 135.393,175.425 136.65,174.168 136.65,171.275 135.941,170.566 135.941,170.359 136.087,170.212 144.618,170.212 144.78,170.375 v2(144.875,170.375) ; v2@144.958,170.308 145.037,170.308 145.132,170.213 169.21,170.213 175.7,176.703 175.7,180.662 177.213,182.175 186.875,182.175 187.33,181.72 187.33,181.709 187.7,181.338 XP6.12@187.7,181
  INT1 w0.2: v2(89.522,155.536) 89.446,155.459 89.228,155.459 89.205,155.436 88.587,155.436 88.236,155.084 87.851,154.7 87.5,154.349 87.5,152.651 103.876,136.275 156.624,136.275 162.85,142.501 162.85,164.999 157.611,170.238 145.121,170.238 144.983,170.375 v2(144.875,170.375)
  INT2 w0.2: XP4.15@28.9,172 28.9,171.648 31.048,169.5 53.947,169.5 55.45,171.003 55.45,172.95 55.95,173.45 59.514,173.45 60.117,174.053 60.283,174.053 60.4,173.936 60.4,171.324 52.5,163.424 52.5,158.442 53.442,157.5 67,157.5 XP5.15@68.5,159
CLK_ADC_p: DA15.6 R40.2 XP4.16 XP5.16 XP6.13 XP7.33 | length 336.1
  Top w0.25: DA15.6@61.235,147.25 61.235,147.8 60.875,148.16 60.875,148.927 60.875,149.279 61.021,149.425 61.175,149.425 61.6,149.85 R40.2@61.6,150.25 61.6,150.65 61.175,151.075 61.021,151.075 60.875,151.221 60.875,151.555 64.18,154.861 89.201,154.861 89.259,154.803 89.455,154.803 v2(89.522,154.736) 89.589,154.803 89.786,154.803 89.844,154.861 90.882,154.861 93.925,157.904 93.925,161.75 93.425,162.25 69.75,162.25 XP5.16@68.5,161 ; XP7.33@123.8,172 123.8,171.925 126.1,169.625 144.554,169.625 144.612,169.567 144.808,169.567 v2(144.875,169.5) ; v2@144.888,169.567 145.037,169.567 145.132,169.663 169.438,169.663 176.25,176.475 176.25,177.125 176.7,177.575 188.475,177.575 189.7,178.8 XP6.13@189.7,179
  INT1 w0.2: v2(89.522,154.736) 89.446,154.812 89.228,154.812 89.205,154.836 88.836,154.836 88.1,154.1 88.1,152.9 104.125,136.875 156.375,136.875 162.25,142.75 162.25,164.75 157.363,169.638 145.121,169.638 144.983,169.5 v2(144.875,169.5)
  INT2 w0.2: XP4.16@28.9,174 30.9,176 31.4,176.5 59.818,176.5 61,175.318 61,171.076 53.1,163.176 53.1,162.442 53.217,162.325 67.675,162.325 68.251,161.749 68.251,161.249 XP5.16@68.5,161
CLK_DDAC_n: DA11.7 R32.1 XP7.4 XP10.5 | length 212.4
  Top w0.25: XP7.4@93.8,174 92.575,175.225 91.225,175.225 90.475,174.475 90.475,172.043 90.279,171.846 90.071,171.846 89.925,171.993 89.925,174.875 93.925,178.875 128.2,178.875 130.279,178.875 130.337,178.817 130.533,178.817 v2(130.6,178.75) ; DA11.7@147.84,132.475 147.84,133.025 148.2,133.385 148.2,133.925 148.2,134.504 148.054,134.65 147.9,134.65 147.475,135.075 R32.1@147.475,135.475 147.475,135.875 147.9,136.3 148.054,136.3 148.2,136.446 148.2,137.804 148.142,137.862 148.142,138.058 v2(148.075,138.125)
  INT1 w0.2: v2(130.6,178.75) 130.677,178.827 130.894,178.827 130.917,178.85 131.349,178.85 148.175,162.024 148.175,138.442 148.152,138.419 148.152,138.202 v2(148.075,138.125)
  INT2 w0.2: v2(148.075,138.125) 148.152,138.048 148.152,137.831 148.175,137.808 148.175,134.05 148.351,133.874 148.576,133.649 148.799,133.426 149.15,133.075 189.516,133.075 193.391,136.951 194.249,136.951 209.55,152.251 209.55,177.517 209.758,177.725 213.225,177.725 XP10.5@214.5,179
CLK_DDAC_p: DA11.6 R32.2 XP7.5 XP10.6 | length 217.9
  Top w0.25: XP7.5@95.8,172 95.8,171.662 95.455,171.316 95.455,171.255 94.65,170.45 90.3,170.45 89.375,171.375 89.375,175.103 93.697,179.425 130.279,179.425 130.337,179.483 130.533,179.483 v2(130.6,179.55) ; v2(148.875,138.125) 148.808,138.058 148.808,137.862 148.75,137.804 148.75,136.446 148.896,136.3 149.05,136.3 149.475,135.875 R32.2@149.475,135.475 149.475,135.075 149.05,134.65 148.896,134.65 148.75,134.504 148.75,134.152 148.75,133.385 149.11,133.025 DA11.6@149.11,132.475
  INT1 w0.2: v2(130.6,179.55) 130.677,179.473 130.894,179.473 130.917,179.45 131.597,179.45 148.775,162.272 148.775,138.442 148.798,138.419 148.798,138.202 v2(148.875,138.125)
  INT2 w0.2: v2(148.875,138.125) 148.798,138.048 148.798,137.831 148.775,137.808 148.775,134.299 149.399,133.675 189.267,133.675 193.143,137.551 194.001,137.551 208.95,152.5 208.95,181.2 209.925,182.175 213.325,182.175 XP10.6@214.5,181
CLK_RG: DD1.69 DD4.92 | length 150.3
  Top w0.25: 65.75,41.549 DD1.69@65.75,44.837 ; 65.75,41.6 65.75,11.157 70.907,6 126.844,6 139,18.156 139,34.746 130.596,43.15 DD4.92@122.9,43.15
CONF_DO: DD1.92 R9.1 | length 7.8
  Top w0.25: DD1.92@69.488,56.575 R9.1@77.306,56.575
D1_n: DD4.103 DD5.3 | length 191.5
  Top w0.25: DD5.3@23.55,30.85 23.485,30.915 22.81,30.915 22.5,31.225 20.925,31.225 19.35,29.65 19.35,17.85 32.8,4.4 127.5,4.4 140.7,17.6 140.7,38.753 130.828,48.625 DD4.103@123.615,48.625
D1_p: DD4.104 DD5.1 | length 195.9
  Top w0.25: DD5.1@23.55,32.15 23.5,32.1 22.8,32.1 22.475,31.775 20.697,31.775 18.8,29.878 18.8,17.622 32.572,3.85 127.728,3.85 141.25,17.372 141.25,38.981 131.056,49.175 123.387,49.175 123.362,49.15 DD4.104@122.9,49.15
D1A_n: DD5.4 XP8.3 | length 12.1
  Top w0.25: DD5.4@25.85,30.85 v2(27.025,30.85)
  INT1 w0.2: v2(27.025,30.85) 27.025,30.867 27.358,31.2 27.524,31.2 29.43,29.294 29.43,23.12 XP8.3@28.46,22.15
D1A_p: DD5.6 XP8.4 | length 13.1
  Top w0.25: DD5.6@25.85,32.15 v2(27.025,32.15)
  INT1 w0.2: v2(27.025,32.15) 27.025,32.133 27.358,31.8 27.772,31.8 30.03,29.542 30.03,23.12 XP8.4@31,22.15
DAT1_DAC: DA5.4 DD4.77 | length 33.3
  Top w0.25: DD4.77@122.9,35.65 127.05,35.65 129.457,33.243 v1(129.457,32.332)
  Bottom w0.5: v1(129.457,32.332) 147.157,32.332 148.375,33.55 DA5.4@148.375,38.992
DAT1_DAC_n: DA5.7 R16.2 XP4.2 XP5.2 | length 405
  Top w0.25: v2(50.4,161.13) 50.305,161.13 50.089,161.346 49.621,161.346 49.475,161.2 49.475,158.7 50.008,158.167 53.029,158.167 53.175,158.314 53.175,160.05 53.767,160.642 53.804,160.642 54.162,161 XP5.2@54.5,161
  INT1 w0.2: XP4.2@14.9,174 14.548,174 14.206,173.658 14.158,173.658 13.25,172.75 13.25,170.774 4.65,162.174 4.65,25.35 20.85,9.15 131.65,9.15 150.505,28.005 150.505,51.183 150.528,51.206 150.528,51.423 v2(150.605,51.5)
  INT2 w0.2: XP4.2@14.9,174 14.548,174 14.206,173.658 14.158,173.658 12.5,172 12.5,166.5 14.249,164.751 14.6,164.4 46.429,164.4 49.699,161.13 ; 49.754,161.075 49.699,161.13 ; v2(50.4,161.13) 49.699,161.13
  Bottom w0.25: v2@150.605,51.584 v2(150.605,51.5) 150.538,51.433 150.538,50.838 150.48,50.78 150.48,48.813 150.626,48.667 150.78,48.667 151.205,48.242 R16.2@151.205,47.842 151.205,47.442 150.47,46.707 150.47,45.463 150.616,45.317 150.64,45.317 150.915,45.042 DA5.7@150.915,44.492
DAT1_DAC_p: DA5.6 R16.1 XP4.3 XP5.3 | length 404.1
  Top w0.25: v2(50.61,162.093) 50.515,162.093 50.318,161.896 49.394,161.896 48.925,161.427 48.925,158.472 49.78,157.617 55.492,157.617 56.142,158.267 56.142,158.304 56.5,158.662 XP5.3@56.5,159
  INT1 w0.2: XP4.3@16.9,172 16.9,171.65 15.75,170.5 13.824,170.5 5.25,161.926 5.25,25.599 21.099,9.75 131.401,9.75 149.905,28.254 149.905,51.183 149.882,51.206 149.882,51.423 v2(149.805,51.5)
  INT2 w0.2: XP4.3@16.9,172 16.9,171.65 15.855,170.605 13.217,170.605 13.1,170.488 13.1,166.749 14.849,165 46.677,165 49.781,161.896 50.304,161.896 50.502,162.093 v2(50.61,162.093)
  Bottom w0.25: DA5.6@149.645,44.492 149.92,44.767 149.92,46.727 149.205,47.442 R16.1@149.205,47.842 149.205,48.242 149.63,48.667 149.784,48.667 149.93,48.813 149.93,50.78 149.872,50.838 149.872,51.433 v2(149.805,51.5) v2@149.93,51.5
DAT2_DAC: DA6.4 DD4.76 | length 58.1
  Top w0.25: DD4.76@122.9,35.15 126.15,35.15 127.9,33.4 v1(127.9,30.9)
  Bottom w0.5: v1(127.9,30.9) 168.565,30.9 171.165,33.5 DA6.4@171.165,38.992
DAT2_DAC_n: DA6.7 R18.2 XP6.2 XP7.7 XP12.5 XP13.5 | length 471
  INT1 w0.2: XP13.5@159,179 159,178.808 157.642,177.45 154.207,177.45 153.45,178.207 153.45,182.041 154.559,183.15 163.949,183.15 164.3,182.799 168.841,178.257 175.731,178.257 176,178.526 176,179.75 177.001,180.751 177.451,180.751 XP6.2@177.7,181 ; v2(173.5,50.5) 173.423,50.577 173.423,50.794 173.4,50.817 173.4,51.1 177.05,54.75 256.224,54.75 256.575,55.101 268.349,66.875 268.7,67.226 268.7,167.174 259.87,176.003 244.373,176.003 243.209,177.167 243.209,177.333 243.326,177.45 245.942,177.45 247.3,178.808 XP12.5@247.3,179
  INT2 w0.2: XP7.7@97.8,172 97.8,171.808 96.442,170.45 90.701,170.45 89.65,171.501 88.65,172.501 88.65,174.899 89.001,175.25 90.876,177.125 150.249,177.125 151.074,176.3 163.701,176.3 165.15,177.749 165.15,179.451 164.917,179.685 164.617,179.685 164.5,179.568 164.5,178.607 163.518,177.625 160.375,177.625 XP13.5@159,179 ; XP6.2@177.7,181 177.451,180.751 176.968,180.751 176.25,180.033 176.25,178.374 176.133,178.257 175.967,178.257 175.5,178.724 175.5,180.285 182.515,187.3 231.176,187.3 236.076,182.4 238.455,180.021 241.633,180.021 242.25,179.404 242.25,178.126 242.926,177.45 245.942,177.45 247.3,178.808 XP12.5@247.3,179
  Bottom w0.25: v2(173.5,50.5) 173.433,50.433 173.433,50.237 173.375,50.179 173.375,48.813 173.521,48.667 173.675,48.667 174.1,48.242 R18.2@174.1,47.842 174.1,47.442 173.345,46.687 173.345,45.402 173.705,45.042 DA6.7@173.705,44.492
DAT2_DAC_p: DA6.6 R18.1 XP6.3 XP7.8 XP12.6 XP13.6 | length 470
  INT1 w0.2: XP13.6@159,181 157.808,182.192 157.808,182.358 158,182.55 163.7,182.55 168.593,177.657 178.69,177.657 179.7,178.667 XP6.3@179.7,179 ; v2(172.7,50.5) 172.777,50.577 172.777,50.794 172.8,50.817 172.8,51.349 176.801,55.35 255.975,55.35 268.1,67.475 268.1,166.925 259.622,175.403 244.124,175.403 241.75,177.777 241.75,181.642 242.658,182.55 245.75,182.55 XP12.6@247.3,181
  INT2 w0.2: XP7.8@97.8,174 96.45,175.35 90.958,175.35 90.25,174.642 90.25,172.15 90.133,172.033 89.967,172.033 89.25,172.75 89.25,174.65 91.125,176.525 150,176.525 150.825,175.7 163.95,175.7 165.75,177.5 165.75,179.7 165.165,180.285 164.667,180.285 164.55,180.402 164.55,181.325 163.55,182.325 160.325,182.325 XP13.6@159,181 ; XP6.3@179.7,179 179.7,177.75 179.2,177.25 176.126,177.25 174.9,178.476 174.9,180.533 182.267,187.9 231.424,187.9 238.703,180.621 241.633,180.621 241.75,180.738 241.75,181.642 242.658,182.55 245.75,182.55 XP12.6@247.3,181
  Bottom w0.25: DA6.6@172.435,44.492 172.435,45.042 172.795,45.402 172.795,46.747 172.1,47.442 R18.1@172.1,47.842 172.1,48.242 172.525,48.667 172.679,48.667 172.825,48.813 172.825,50.179 172.767,50.237 172.767,50.433 v2(172.7,50.5)
DAT_ADC1: DA10.1 DD1.58 | length 214.4
  Top w0.25: 60.25,38.65 DD1.58@60.25,44.837
  Top w0.5: DA10.1@38.595,148.85 38.595,142.08 53,127.675 53,116.25 49.25,112.5 49.25,101.05 16.5,68.3 16.5,44.775 26.3,34.975 42.15,34.975 60.875,16.25 63.275,16.25 64.3,17.275 64.3,23.275 60.25,27.325 60.25,38.65
DAT_ADC1_n: DA10.7 R25.2 R26.1 XP4.18 | length 63.8
  Top w0.25: DA10.7@39.865,154.35 40.025,154.51 40.025,155.56 40.175,155.71 40.175,157.379 40.029,157.525 39.875,157.525 39.45,157.95 R26.1@39.45,158.35 39.45,158.75 40.125,159.425 40.125,159.925 40.125,160.725 39.4,161.45 R25.2@39.4,161.75 39.4,162.05 40.125,162.775 40.125,163.403 42.022,165.3 44.8,165.3 47.835,168.335 54.792,168.335 58.625,172.168 58.625,174.929 58.567,174.987 58.567,175.183 v2(58.5,175.25)
  INT2 w0.2: XP4.18@30.9,174 32.15,175.25 v2(58.5,175.25)
DAT_ADC1_p: DA10.6 R26.2 R27.1 XP4.19 | length 66.2
  Top w0.25: 40.675,160.153 40.675,160.725 41.4,161.45 R27.1@41.4,161.75 41.4,162.05 40.675,162.775 40.675,163.175 42.25,164.75 45.028,164.75 48.063,167.785 55.02,167.785 59.175,171.94 59.175,174.929 59.233,174.987 59.233,175.183 v2(59.3,175.25) ; 40.675,160.153 40.675,159.525 41.45,158.75 R26.2@41.45,158.35 41.45,157.95 41.025,157.525 40.871,157.525 40.725,157.379 40.725,155.938 40.725,155.675 40.902,155.498 40.902,154.583 DA10.6@41.135,154.35
  INT2 w0.2: XP4.19@32.9,172 34.15,170.75 53.5,170.75 54.25,171.5 54.25,174 54.9,174.65 59.017,174.65 59.234,174.867 59.234,175.184 v2(59.3,175.25)
DAT_ADC2: DA13.1 DD1.60 | length 130.7
  Top w0.25: DD1.60@61.25,44.837 61.25,40.85 64.475,37.625 v1(64.7,37.625)
  Top w0.5: v1(105.645,133.75) DA13.1@105.645,138.597
  Bottom w0.5: v1(64.7,37.625) 71.475,37.625 84.418,50.568 84.418,62.243 97.85,75.675 97.85,104.025 105.7,111.875 105.7,122.643 105.645,122.698 v1(105.645,133.75)
DAT_ADC2_n: DA13.7 R30.2 R31.1 XP5.18 | length 57.7
  Top w0.25: R30.2@106.4,151.445 106.4,151.845 107.15,152.595 107.15,153.385 107.15,156.979 107.092,157.037 107.092,157.233 v2(107.025,157.3) ; R30.2@106.45,151.198 106.45,150.995 106.825,150.62 107.004,150.62 107.15,150.474 107.15,149.548 107.15,149.148 106.5,148.497 R31.1@106.5,148.097 106.5,147.697 106.925,147.272 107.079,147.272 107.225,147.126 107.225,145.457 107.075,145.307 107.075,144.257 DA13.7@106.915,144.097
  INT2 w0.2: XP5.18@70.5,161 71.825,162.325 102.925,162.325 103.276,161.974 104.274,160.976 104.625,160.625 104.625,156.675 105.35,155.95 106.55,155.95 107.125,156.525 107.125,156.983 107.102,157.006 107.102,157.223 v2(107.025,157.3)
DAT_ADC2_p: DA13.6 R31.2 R34.1 XP5.19 | length 60
  Top w0.25: v2(107.825,157.3) 107.758,157.233 107.758,157.037 107.7,156.979 107.7,153.158 107.7,152.548 108.45,151.797 R34.1@108.45,151.497 108.45,151.198 107.7,150.447 107.7,149.775 107.7,149.297 108.5,148.497 R31.2@108.5,148.097 108.5,147.697 108.075,147.272 107.921,147.272 107.775,147.126 107.775,145.685 107.775,145.422 107.952,145.245 107.952,144.33 DA13.6@108.185,144.097
  INT2 w0.2: XP5.19@72.5,159 73.775,157.725 92.71,157.725 93.65,158.665 93.65,161.1 94.275,161.725 102.676,161.725 104.025,160.376 104.025,156.426 105.101,155.35 106.799,155.35 107.725,156.276 107.725,156.983 107.748,157.006 107.748,157.223 v2(107.825,157.3)
DAT_ADC3: DA16.1 DD1.110 | length 204
  Top w0.25: DD1.110@66.75,66.813 66.75,68.975 73.525,75.75 75.459,75.75
  Top w0.5: 75.459,75.75 85.975,75.75 96.7,86.475 v1(123.225,86.475) ; DA16.1@190.27,151.4 190.273,151.398 190.273,148.727 v1(190.275,148.725)
  Bottom w0.5: v1(123.225,86.475) 123.225,99.55 137.5,113.825 197.475,113.825 202.675,119.025 202.675,136.325 v1(190.275,148.725)
DAT_ADC3_n: DA16.7 R37.2 R38.1 XP6.15 | length 33.2
  Top w0.25: DA16.7@191.54,156.9 191.7,157.06 191.7,158.11 191.85,158.26 191.85,159.929 191.704,160.075 191.55,160.075 191.125,160.5 R38.1@191.125,160.9 191.125,161.3 191.8,161.975 191.8,162.475 191.8,163.275 191.075,164 R37.2@191.075,164.3 191.075,164.6 191.8,165.325 191.8,167.225 191.8,174.425 191.8,176.063 192.912,177.175 196.908,177.175 197.054,177.321 197.054,178.054 196.908,178.201 196.701,178.201 196.25,177.75 192.95,177.75 XP6.15@191.7,179
DAT_ADC3_p: DA16.6 R38.2 R41.1 XP6.16 | length 36.9
  Top w0.25: XP6.16@191.7,181 191.7,181.175 192.6,182.075 196.325,182.075 196.975,181.425 196.975,178.975 197.604,178.346 197.604,177.094 197.136,176.625 193.14,176.625 192.35,175.835 192.35,174.653 192.35,167.453 192.35,165.325 193.075,164.6 R41.1@193.075,164.3 193.075,164 192.35,163.275 192.35,162.703 192.35,162.075 193.125,161.3 R38.2@193.125,160.9 193.125,160.5 192.7,160.075 192.546,160.075 192.4,159.929 192.4,158.488 192.4,158.225 192.577,158.048 192.577,157.133 DA16.6@192.81,156.9